# Altium PCB 20K Control Board V1.1.PcbDoc (part 5 of 24)
Units mm, origin at the board's own origin, x right, y up, seen from the top; angles counter-clockwise.
Board outline 132 x 260 mm, 4 copper layers (Top Layer, GND, VCC, Bottom Layer); 1384 components, 779 nets, 4515 pads, 1774 vias.
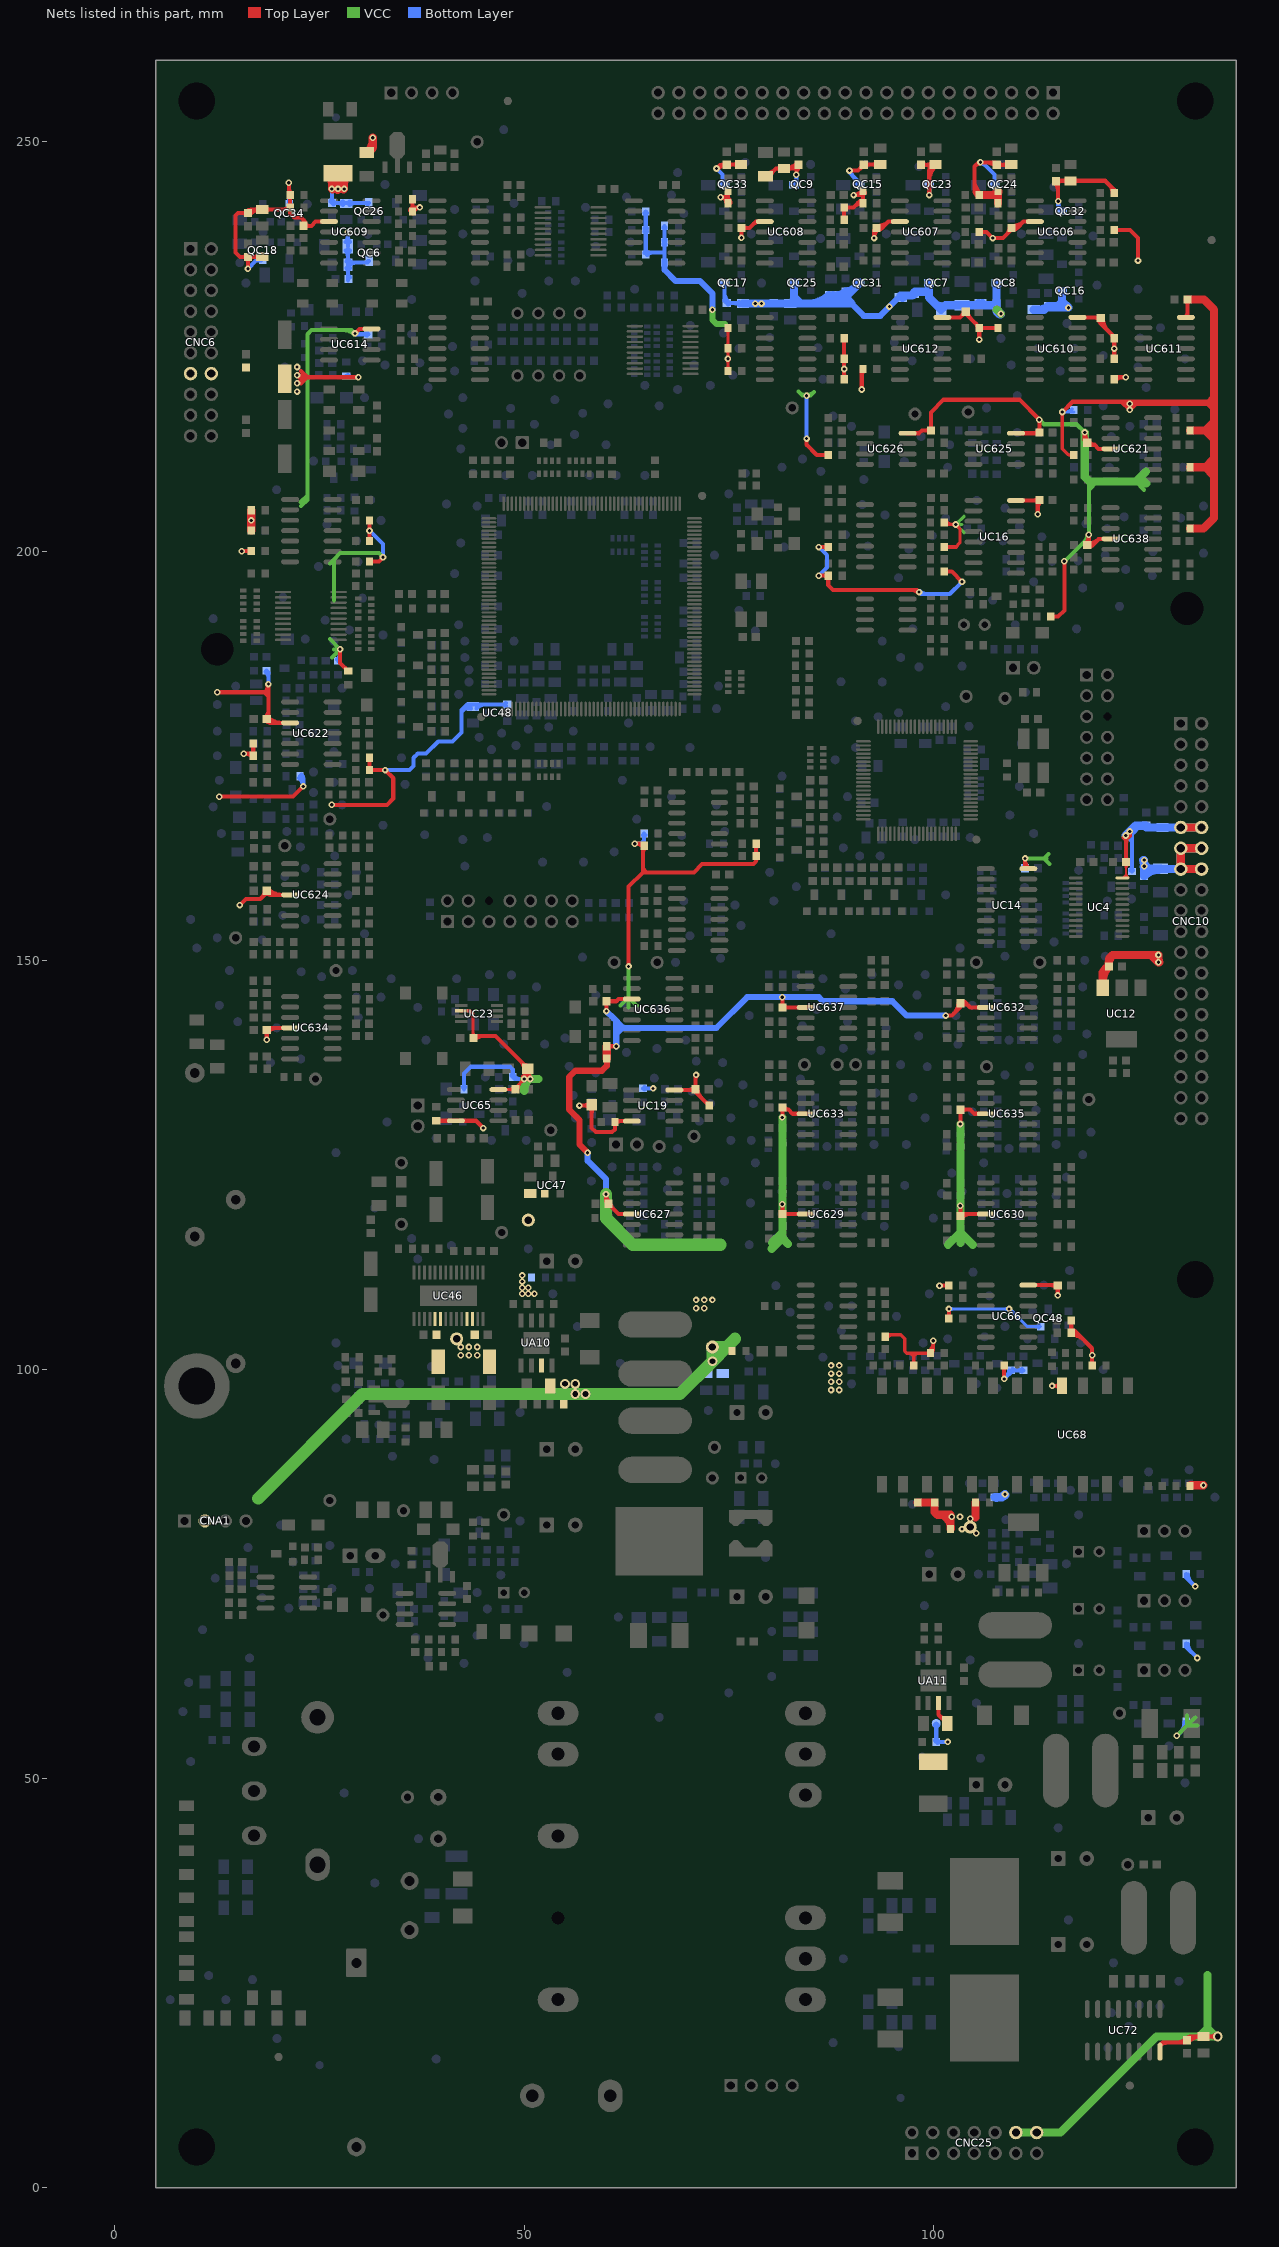
[diagram p7: the nets of this part, all layers, seen from the top]

## Via types
v1: diameter 0.8, hole 0.4, Top Layer to Bottom Layer, tented both sides, 1354 vias
v2: diameter 1.2, hole 0.7, Top Layer to Bottom Layer, 261 vias
v3: diameter 0.8, hole 0.4, Top Layer to Bottom Layer, 58 vias
v4: diameter 1.2, hole 0.7, Top Layer to Bottom Layer, tented top, 58 vias
v5: diameter 0.8, hole 0.4, Top Layer to Bottom Layer, tented top, 22 vias
v6: diameter 1.2, hole 0.7, Top Layer to Bottom Layer, tented both sides, 13 vias
v7: diameter 1.2, hole 0.7, Top Layer to Bottom Layer, tented bottom, 8 vias

## Nets (pads, with @x,y where several pads share a name; then routed paths per layer and width w, separated by ;. In a path a pad name is that pad's centre, name@x,y a point inside that pad or via, vN(x,y) a via of type N, cw(c..) or ccw(c..) an arc to the next point about the centre after c; other vN are vias at no path point) (continued)
+5V: +5V.1 CC84.2 CC95.2 CC103.1 CC163.2 CC183.1 CC184.1 CC193.1 CC196.1 CC222.2 CC292.2 CC295.1 CC302.1 CC318.2 CC326.2 CC327.1 CC393.1 CC401.1 CNC10.11 CNC10.12 EC1.1 EC3.1 LDM1.1 LDM3.1 QC48.2 RA111.1 RC115.2 RC205.1 RC206.2 RC208.1 RC223.1 RC238.2 RC245.2 RC251.2 RC254.2 RC267.2 RC291.2 RC293.2 RC294.2 RC295.2 RC297.2 RC299.2 RC300.2 RC301.2 RC302.2 RC307.2 RC308.2 RC313.2 RC315.2 RC318.2 RC320.2 RC321.2 RC323.2 RC324.2 RC331.2 RC332.2 RC333.2 RC336.2 RC359.2 RC443.2 RC445.2 RC448.2 RC471.2 RC473.2 RC474.2 RC479.2 RC482.1 RC486.1 RC488.2 RC497.2 RC505.1 RC594.2 RC597.2 RC598.2 RC599.1 RC607.1 RC610.2 RC618.1 RC619.1 RC625.1 RC628.2 RC637.2 RC649.2 RC659.1 RC663.2 RC674.2 RC680.1 RC685.2 RC687.2 TP57.1 UC4.24 UC14.16 UC16.16 UC19.4 UC19.8 UC23.2 UC46.5 UC46.6 UC46.11 UC46.12 UC47.1 UC48.1 UC65.4 UC65.8 UC66.14 UC68.4 UC610.14 UC611.14 UC612.14 UC614.8 | length 624.9
  Top Layer w0.25: UC4.24@123.1,160.075 123.55,160.075 123.55,160.5 ; UC4.24@123.125,160.075 123.55,160.5 ; CC222.2@123.285,161.735 cw(c122.645,161.095) 123.55,161.095 cw(c124.455,161.095) CC222.2@123.815,161.735 ; 123.55,160.739 ccw(c124.439,160.739) UC4.24@123.81,160.11 ; CC222.2@123.55,162 123.55,160.5
  Top Layer w0.4: UC23.2@42.323,143.825 43.425,143.825 43.75,143.5 43.75,141.25 ; CC163.2@43.588,140.712 ccw(c43.196,141.104) 43.75,141.104 ; CC163.2@43.75,140.55 43.75,141.25 ; CC163.2@43.993,140.73 cw(c44.428,141.25) 43.75,141.25 ; UC65.8@46.85,134.205 CC393.1@48.905,134.205 ; 48.117,134.205 ccw(c48.117,135.083) CC393.1@48.738,134.462 ; 48.334,134.205 cw(c48.334,133.634) CC393.1@48.738,134.038 ; CC393.1@48.95,134.25 48.95,134.45 v1(50,135.5) 50.425,135.925 ; CC393.1@49.25,134.25 cw(c50.457,134.25) 49.604,135.104 ; v1@49.8,135.5 cw(c49.317,135.5) 49.659,135.159 cw(c50,134.817) v1@50,135.3 ; v1@50,135.7 ccw(c50,136.183) 50.341,135.841 ccw(c50.683,135.5) v1@50.2,135.5 ; v1@50.036,135.536 cw(c50.54,135.031) v1@50.832,135.683 ; LDM3.1@50.147,136.396 cw(c49.699,135.825) 50.425,135.825 ; 50.425,135.798 ccw(c51.042,135.798) v1@50.61,135.357 ; LDM3.1@50.703,136.396 ccw(c51.151,135.825) 50.425,135.825 ; v1@50.89,135.643 cw(c51.975,136.75) LDM3.1@50.425,136.75 50.425,135.925 ; RC323.2@74.723,222.227 ccw(c74.296,222.654) 74.9,222.654 ccw(c75.504,222.654) RC323.2@75.077,222.227 ; RC331.2@74.723,224.563 cw(c74.296,224.136) 74.9,224.136 cw(c75.504,224.136) RC331.2@75.077,224.563 ; RC331.2@74.723,225.017 ccw(c74.296,225.444) 74.9,225.444 ccw(c75.504,225.444) RC331.2@75.077,225.017 ; RC321.2@74.723,227.023 cw(c74.296,226.596) 74.9,226.596 cw(c75.504,226.596) RC321.2@75.077,227.023 ; v1@74.759,223.359 cw(c74.417,223.017) 74.9,223.017 cw(c75.383,223.017) v1@75.041,223.359 ; v1@74.759,223.641 ccw(c74.417,223.983) 74.9,223.983 ccw(c75.383,223.983) v1@75.041,223.641 ; RC323.2@74.9,222 RC331.2@74.9,224.79 RC321.2@74.9,227.25 ; RC663.2@94.1,104 94.35,104.25 96,104.25 96.5,103.75 96.5,102.25 96.75,102 97.2,102 ; RC663.2@94.277,103.873 cw(c95.186,102.964) 95.186,104.25 ; RC637.2@97.423,100.727 ccw(c96.996,101.154) 97.6,101.154 ccw(c98.204,101.154) RC637.2@97.777,100.727 ; RC637.2@97.6,100.5 97.6,101.6 ; RC597.2@99.473,101.823 ccw(c99.046,101.396) 99.046,102 ccw(c99.046,102.604) RC597.2@99.473,102.177 ; RC597.2@99.473,102.227 ccw(c98.201,103.499) v1(100,103.5) ; RC597.2@99.756,101.944 ccw(c99.167,102.533) 100,102.533 ; v1@99.859,103.359 cw(c99.517,103.017) 100,103.017 cw(c100.483,103.017) v1@100.141,103.359 ; v1(100,103.5) 100,102.35 RC597.2@99.65,102 98,102 ; RC223.1@101.527,203.627 ccw(c102.436,204.536) v1@102.436,203.25 ; RC223.1@101.6,203.25 v1(102.75,203.25) 103.25,202.75 103.25,201 102.75,200.5 ; v1@102.609,203.109 ccw(c102.267,202.767) 102.267,203.25 ccw(c102.267,203.733) v1@102.609,203.391 ; v1@102.75,203.05 cw(c102.75,202.567) 103.091,202.909 cw(c103.433,203.25) v1@102.95,203.25 ; v1@115.609,216.859 cw(c115.267,216.517) 115.75,216.517 cw(c116.233,216.517) v1@115.891,216.859 ; v1(115.75,217) 115.75,212.5 116.5,211.75 RC479.2@117.15,211.75 ; RC479.2@116.973,211.573 ccw(c116.546,211.146) 116.546,211.75 ccw(c116.546,212.354) RC479.2@116.973,211.927 ; 50.425,135.825 50.425,135.925 ; 50.425,135.925 ccw(c49.894,135.925) 50.181,136.372 cw(c49.894,135.925) 50.425,135.925 ; 50.425,135.925 cw(c50.956,135.925) 50.669,136.372 ccw(c50.956,135.925) 50.425,135.925 ; 97.2,102 98,102 ; 97.2,102 97.6,101.6 ; 97.6,101.6 98,102
  Top Layer w0.5: v1(15.5,200) RC674.2@16.65,200 ; v1(15.75,175.25) RC443.2@16.9,175.25 ; v1@15.934,175.25 cw(c15.934,174.084) RC443.2@16.759,174.909 ; RC674.2@16.509,199.859 ccw(c16.167,199.517) 16.167,200 ccw(c16.167,200.483) RC674.2@16.509,200.141 ; RC443.2@16.759,175.191 ccw(c16.417,175.533) 16.9,175.533 ccw(c17.383,175.533) RC443.2@17.041,175.191 ; RC445.2@16.759,176.309 cw(c16.417,175.967) 16.9,175.967 cw(c17.383,175.967) RC445.2@17.041,176.309 ; RC443.2@16.9,175 RC445.2@16.9,176.5 ; v1(26.5,169) 33.25,169 34,169.75 34,172.25 v1(33,173.25) RC486.1@31.1,173.25 RC482.1@31.1,174.75 ; v1(27.5,188) 27.5,186.35 RC473.2@28.5,185.35 ; RC473.2@28.073,185.777 cw(c27.646,185.35) RC473.2@28.25,185.35 ; v1(29.327,226.594) 29.888,227.155 UC614.8@31.35,227.155 ; RC486.1@30.959,173.441 ccw(c30.617,173.783) 31.1,173.783 ccw(c31.583,173.783) RC486.1@31.241,173.441 ; RC482.1@30.959,174.559 cw(c30.617,174.217) 31.1,174.217 cw(c31.583,174.217) RC482.1@31.241,174.559 ; RC299.2@30.959,201.441 ccw(c30.617,201.783) 31.1,201.783 ccw(c31.583,201.783) RC299.2@31.241,201.441 ; RC302.2@30.959,203.559 cw(c30.617,203.217) 31.1,203.217 cw(c31.583,203.217) RC302.2@31.241,203.559 ; RC295.2@31.1,198.75 32.25,198.75 v1(32.75,199.25) ; RC299.2@31.1,201.5 v1(31.1,202.5) RC302.2@31.1,203.75 ; RC486.1@31.241,173.109 cw(c31.583,172.767) 31.583,173.25 cw(c31.583,173.733) RC486.1@31.241,173.391 ; RC295.2@31.241,198.609 cw(c31.583,198.267) 31.583,198.75 cw(c31.583,199.233) RC295.2@31.241,198.891 ; RC599.1@39.25,130.4 UC65.4@41.645,130.4 ; RC599.1@39.441,130.259 cw(c39.783,129.917) 39.783,130.4 cw(c39.783,130.883) RC599.1@39.441,130.541 ; UC65.4@41.65,130.395 44.105,130.395 v1(45,129.5) ; CC163.2@43.8,140.5 44.05,140.75 46.5,140.75 48.25,139 LDM3.1@50.425,136.825 ; CC163.2@43.977,140.323 cw(c45.007,139.293) 45.007,140.75 ; 49.604,137.646 cw(c48.708,136.75) LDM3.1@49.975,136.75 ; v1@49.878,135.828 cw(c50.108,135.21) v1@50.574,135.676 ; LDM3.1@49.906,137.344 ccw(c50.375,137.814) LDM3.1@50.375,137.15 ; v1(50,135.5) v1(50.75,135.5) 50.425,135.825 ; LDM3.1@50.151,136.459 cw(c49.556,135.825) 50.425,135.825 ; LDM3.1@50.699,136.459 ccw(c51.294,135.825) 50.425,135.825 ; v1@50.845,135.616 cw(c51.565,136.5) 50.425,136.5 50.425,135.825 ; v1(56.75,132.25) LDM1.1@58.1,132.25 ; 57.224,132.25 ccw(c57.224,133.301) LDM1.1@57.967,132.558 ; 57.345,132.25 cw(c57.345,131.37) 57.967,131.992 cw(c57.284,131.309) 58.25,131.309 cw(c59.216,131.309) LDM1.1@58.533,131.992 ; LDM1.1@58.175,132.325 LDM1.1@58.25,132.325 58.25,129.5 58.75,129 60.75,129 61.1,129.35 RC205.1@61.1,130.25 ; RC205.1@60.959,130.059 cw(c60.617,129.717) 61.1,129.717 cw(c61.583,129.717) RC205.1@61.241,130.059 ; RC205.1@61.1,130.345 UC19.4@63.15,130.345 ; RC205.1@61.241,130.159 cw(c61.691,129.709) 61.691,130.345 ; v1(62.75,149.25) 62.75,159 64.5,160.75 ; v1(63.5,164.25) RC685.2@64.65,164.25 ; v1@63.684,164.25 cw(c63.684,163.084) RC685.2@64.509,163.909 ; 64.5,163.105 cw(c65.495,163.105) RC685.2@64.791,163.809 ; RC685.2@64.5,163.884 64.5,161.2 ; 64.95,160.75 64.5,161.2 ; UC19.8@68.35,134.155 CC103.1@70.855,134.155 ; 70.117,134.155 ccw(c70.117,135.083) 70.773,134.427 ccw(c70.346,134.854) 70.95,134.854 ccw(c71.554,134.854) CC103.1@71.127,134.427 ; 70.95,135.517 cw(c71.483,135.517) v1@71.106,135.894 ; v1@70.95,136 CC103.1@70.95,134.25 70.95,133.9 RC206.2@72.6,132.25 ; CC103.1@71.2,134.25 ccw(c72.649,134.25) 71.624,133.226 ; RC206.2@72.173,132.677 ccw(c72.6,133.104) RC206.2@72.6,132.5 ; RC687.2@78.209,162.559 cw(c77.867,162.217) 78.35,162.217 cw(c78.833,162.217) RC687.2@78.491,162.559 ; RC687.2@78.209,162.941 ccw(c77.867,163.283) 78.35,163.283 ccw(c78.833,163.283) RC687.2@78.491,162.941 ; RC659.1@78.209,164.059 cw(c77.867,163.717) 78.35,163.717 cw(c78.833,163.717) RC659.1@78.491,164.059 ; RC659.1@78.35,164.25 RC687.2@78.35,162.75 78.35,162.1 78,161.75 71.75,161.75 70.75,160.75 64.5,160.75 ; v1(84.5,213.75) 84.5,213 85.75,211.75 RC115.2@87.15,211.75 ; v1(86,197) RC254.2@87.15,197 87.15,195.85 87.75,195.25 98,195.25 v1(98.25,195) ; v1(86,200.5) RC238.2@87.15,200.5 ; RC254.2@87.009,196.809 cw(c86.667,196.467) 87.15,196.467 cw(c87.633,196.467) RC254.2@87.291,196.809 ; RC254.2@87.009,196.859 ccw(c86.667,196.517) 86.667,197 ccw(c86.667,197.483) RC254.2@87.009,197.141 ; RC238.2@87.009,200.359 ccw(c86.667,200.017) 86.667,200.5 ccw(c86.667,200.983) RC238.2@87.009,200.641 ; RC115.2@87.009,211.609 ccw(c86.667,211.267) 86.667,211.75 ccw(c86.667,212.233) RC115.2@87.009,211.891 ; RC336.2@88.959,221.191 ccw(c88.617,221.533) 89.1,221.533 ccw(c89.583,221.533) RC336.2@89.241,221.191 ; RC332.2@88.959,223.309 cw(c88.617,222.967) 89.1,222.967 cw(c89.583,222.967) RC332.2@89.241,223.309 ; RC332.2@88.959,223.691 ccw(c88.617,224.033) 89.1,224.033 ccw(c89.583,224.033) RC332.2@89.241,223.691 ; RC318.2@88.959,225.809 cw(c88.617,225.467) 89.1,225.467 cw(c89.583,225.467) RC318.2@89.241,225.809 ; RC336.2@89.1,221 RC332.2@89.1,223.5 RC318.2@89.1,226 ; v1(91.25,219.75) 91.25,222.1 RC333.2@91.4,222.25 ; 91.25,221.355 cw(c92.245,221.355) RC333.2@91.541,222.059 ; 97.284,195.25 cw(c97.284,194.034) v1@98.144,194.894 ; v1(100.75,110.25) RC618.1@101.9,110.25 ; UC612.14@101.1,228.56 103.26,228.56 CC193.1@103.95,229.25 103.95,229.05 105.6,227.4 RC324.2@105.6,227.25 ; RC245.2@101.35,197.5 102.25,197.5 v1(103.5,196.25) ; RC251.2@101.35,200.5 102.75,200.5 ; RC245.2@101.491,197.359 cw(c101.833,197.017) 101.833,197.5 cw(c101.833,197.983) RC245.2@101.491,197.641 ; RC251.2@101.491,200.359 cw(c101.833,200.017) 101.833,200.5 cw(c101.833,200.983) RC251.2@101.491,200.641 ; RC619.1@101.759,106.441 ccw(c101.417,106.783) 101.9,106.783 ccw(c102.383,106.783) RC619.1@102.041,106.441 ; RC618.1@101.759,110.109 ccw(c101.417,109.767) 101.417,110.25 ccw(c101.417,110.733) RC618.1@101.759,110.391 ; RC619.1@101.9,106.5 v1(101.9,107.4) ; CC193.1@103.7,229.25 cw(c103.096,229.25) 103.523,228.823 cw(c103.95,228.396) CC193.1@103.95,229 ; CC193.1@104.2,229.25 ccw(c105.286,229.25) 104.518,228.482 ; 105.188,227.812 cw(c104.676,227.3) RC324.2@105.4,227.3 ; RC324.2@105.459,227.059 cw(c105.117,226.717) 105.6,226.717 cw(c106.083,226.717) RC324.2@105.741,227.059 ; v1(105.6,225.85) RC324.2@105.6,227.25 ; RC324.2@105.741,227.109 cw(c106.083,226.767) 106.083,227.25 cw(c106.083,227.733) RC324.2@105.741,227.391 ; RC293.2@107.759,227.109 ccw(c107.417,226.767) 107.417,227.25 ccw(c107.417,227.733) RC293.2@107.759,227.391 ; RC293.2@107.9,227.25 RC324.2@105.6,227.25 ; RC649.2@108.509,100.309 cw(c108.167,99.967) 108.65,99.967 cw(c109.133,99.967) RC649.2@108.791,100.309 ; v1(108.65,98.85) RC649.2@108.65,100.5 ; UC16.16@110.1,206.195 112.895,206.195 CC95.2@112.95,206.25 ; UC14.16@111.2,161.3 v1(111.2,162.45) ; v1@111.2,162.281 ccw(c112.686,162.281) UC14.16@111.635,161.23 ; UC66.14@111.6,110.31 115.14,110.31 CC401.1@115.2,110.25 v1(115.2,109.05) ; 112.214,206.195 ccw(c112.214,206.986) CC95.2@112.773,206.427 ; v1(112.75,204.5) CC95.2@112.75,206.25 ; 112.75,205.164 cw(c114.036,205.164) CC95.2@113.127,206.073 ; 114.452,110.31 cw(c114.452,109.502) 115.023,110.073 cw(c114.596,109.646) 115.2,109.646 cw(c115.804,109.646) CC401.1@115.377,110.073 ; v1(114.5,98) UC68.4@115.73,98 ; UC68.4@115.483,97.753 ccw(c114.885,97.155) 114.885,98 ccw(c114.885,98.845) UC68.4@115.483,98.247 ; v1(115.75,217) 117,218.25 134.3,218.25 ; RC505.1@116.704,104.712 cw(c116.981,104.216) 117.382,104.618 ; RC505.1@116.709,104.691 ccw(c116.367,105.033) 116.85,105.033 ccw(c117.333,105.033) RC505.1@116.991,104.691 ; RC625.1@116.709,105.809 cw(c116.367,105.467) 116.85,105.467 cw(c117.333,105.467) RC625.1@116.991,105.809 ; RC505.1@116.85,104.25 cw(c116.85,102.077) 118.386,103.614 ; RC505.1@116.85,104.75 cw(c116.85,103.784) 117.533,104.467 ; RC625.1@116.85,106 RC505.1@116.85,104.5 117.5,104.5 119.4,102.6 RC628.2@119.4,100.5 ; RC505.1@116.948,104.275 cw(c117.316,103.616) 117.85,104.15 ; RC505.1@116.991,104.359 cw(c117.333,104.017) 117.333,104.5 cw(c117.333,104.983) RC505.1@116.991,104.641 ; UC610.14@117.6,228.56 CC184.1@120.39,228.56 ; RC628.2@119.259,100.691 ccw(c118.917,101.033) 119.4,101.033 ccw(c119.883,101.033) RC628.2@119.541,100.691 ; 119.702,228.56 cw(c119.702,227.752) 120.273,228.323 cw(c119.726,227.776) 120.5,227.776 ; CC184.1@120.2,228.5 ccw(c121.286,228.5) 120.518,227.732 ; CC184.1@120.5,228.45 120.5,227.75 122.1,226.15 RC301.2@122.1,226 RC313.2@122.1,223.5 ; CC184.1@120.7,228.5 ccw(c122.994,228.5) 121.372,226.878 ; 121.688,226.562 cw(c121.176,226.05) RC301.2@121.9,226.05 ; RC313.2@121.959,223.691 ccw(c121.617,224.033) 122.1,224.033 ccw(c122.583,224.033) RC313.2@122.241,223.691 ; RC301.2@121.959,225.809 cw(c121.617,225.467) 122.1,225.467 cw(c122.583,225.467) RC301.2@122.241,225.809 ; RC320.2@122.1,221 122.35,221.25 v1(123.5,221.25) ; RC320.2@122.241,220.909 cw(c123.066,220.084) 123.066,221.25 ; 123,218.25 v1(124,217.25) ; 123.034,218.25 cw(c123.034,217.034) v1@123.894,217.894 ; CC222.2@123.373,162.177 ccw(c122.946,162.604) 123.55,162.604 ccw(c124.154,162.604) CC222.2@123.727,162.177 ; v1@123.394,165.144 cw(c123.017,164.767) 123.55,164.767 ; 123.5,164.75 123.25,165 v1(124,165.75) ; CC222.2@123.55,162 123.55,165.3 v1(124,165.75) ; 123.55,164.301 cw(c125.449,164.301) v1@124.106,165.644 ; 123.55,164.75 124,165.2 v1(124,165.75) ; v1@123.55,165.114 cw(c124.037,165.114) v1@124.009,165.6 ; v1@123.824,217.697 ccw(c124.122,218.21) 124.541,217.791 ; v1@123.825,165.025 ccw(c123.475,165.375) v1@123.878,165.663 ; v1(124,218) 133.25,218 ; v1@124,218.25 v1(124,217.25) ; v1@124.075,218.13 ccw(c124.46,218.79) 125,218.25 v1(124,217.25) ; v1@124.106,217.894 cw(c124.966,217.034) 124.966,218.25 ; UC611.14@130.815,228.595 ccw(c130.246,229.164) 131.05,229.164 ; CC183.1@130.873,230.573 cw(c130.446,230.146) 131.05,230.146 cw(c131.654,230.146) CC183.1@131.227,230.573 ; UC611.14@131.05,228.76 CC183.1@131.05,230.75 ; 134.05,218 133.5,218 ; 134.25,217.25 133.5,218 ; 134.3,219.05 133.25,218 ; 64.5,160.75 64.5,161.2 ; 133.25,218 133.5,218
  Top Layer w1: RC680.1@16.65,202.5 v1(16.65,203.75) RC307.2@16.65,205 ; CNC10.11@130.23,166.23 CNC10.12@132.77,166.23 ; CC183.1@131.05,230.75 133.05,230.75 134.3,229.5 134.3,204.05 133,202.75 RC448.2@131.35,202.75 ; RC488.2@131.35,210.25 133.25,210.25 ; RC497.2@131.35,214.75 133.25,214.75 ; 134,210.25 133.25,210.25 ; 134,214.75 133.25,214.75 ; 134.25,209.25 133.25,210.25 ; 134.25,211.25 133.25,210.25 ; 134.25,213.75 133.25,214.75 ; 134.25,215.75 133.25,214.75
  VCC w0.4: v1@102.75,203.05 cw(c102.75,202.567) 103.091,202.909 cw(c103.433,203.25) 102.95,203.25 cw(c103.433,203.25) 103.091,203.591 cw(c102.75,203.933) v1@102.75,203.45 ; v1@102.891,203.109 cw(c103.233,202.767) 103.233,203.25 cw(c103.233,203.733) v1@102.891,203.391 ; 103.5,203.25 v1(102.75,203.25) ; 103.75,202.25 v1(102.75,203.25) ; 103.75,204.25 v1(102.75,203.25)
  VCC w0.5: 22.691,206 23.5,206.809 ; 22.75,205.5 23.5,206.25 23.5,206.809 ; 24.25,227 27,227 ; 26.25,189.25 v1(27.5,188) ; 26.25,198.5 26.75,199 ; 26.5,187 v1(27.5,188) ; 26.75,188 v1(27.5,188) ; 26.75,194 26.75,199 ; 27.985,227 cw(c27.985,225.252) v1@29.221,226.488 ; v1(29.327,226.594) 28.921,227 27,227 ; v1(32.75,199.25) 32.25,199.75 27.5,199.75 26.75,199 ; 61.75,144.5 62.75,145.5 ; 62.75,144.25 62.75,145.5 ; v1(62.75,149.25) 62.75,145.5 ; 63.75,144.5 62.75,145.5 ; 83.5,219.5 84,219 v1(84.5,219) 85,219 85.434,219.434 cw(c84.705,220.164) v1@84.526,219.148 ; 83.75,219.25 ccw(c84.173,219.673) v1@84.434,219.135 ; v1(111.2,162.45) 113.5,162.45 ; 113.847,162.45 113.5,162.45 ; 114.05,163 113.5,162.45 ; 114.2,161.75 113.5,162.45 ; 23.5,206.809 23.5,226.5 24,227 27,227
  VCC w0.75: v1(73,229.5) 73,228.279 73.529,227.75 74.5,227.75
  VCC w1: 50,134.042 cw(c52.059,134.042) v1@50.683,135.574 ; 50,134.25 v1(50,135.5) 51.75,135.5 ; 50,134.75 cw(c50.858,134.75) v1@50.736,135.599
  Bottom Layer w0.4: v1(101.9,107.4) 109.35,107.4 111.5,105.25 QC48.2@113.095,105.25 ; v1@102.041,107.259 cw(c102.383,106.917) 102.383,107.4 cw(c102.383,107.883) v1@102.041,107.541 ; v1@109.109,107.259 ccw(c108.767,106.917) 108.767,107.4 ccw(c108.767,107.883) v1@109.109,107.541 ; v1@109.25,107.2 cw(c109.25,106.476) 109.762,106.988 ; QC48.2@112.913,105.068 ccw(c112.474,104.629) 112.474,105.25 ccw(c112.474,105.871) QC48.2@112.913,105.432 ; v1(115.75,217) RC471.2@117.15,217 ; v1@115.891,216.859 cw(c116.233,216.517) 116.233,217 cw(c116.233,217.483) v1@115.891,217.141 ; v1@116.064,217 ccw(c116.064,218.286) RC471.2@116.973,217.377
  Bottom Layer w0.5: RC474.2@27.159,186.741 ccw(c26.334,187.566) 27.5,187.566 ; RC474.2@27.25,186.6 27.5,186.85 v1(27.5,188) ; v1(29.327,226.594) 29.421,226.5 CC196.1@30.95,226.5 ; v1@29.433,226.7 ccw(c29.916,227.184) 29.916,226.5 ; CC196.1@30.773,226.323 ccw(c30.346,225.896) 30.346,226.5 ccw(c30.346,227.104) CC196.1@30.773,226.677 ; v1(31.1,202.5) 32.75,200.85 v1(32.75,199.25) ; v1(33,173.25) 36,173.25 36.5,173.75 36.5,174.75 37,175.25 38,175.25 39.5,176.75 41.25,176.75 42.35,177.85 42.35,179.5 ; RC607.1@42.509,134.441 ccw(c42.167,134.783) 42.65,134.783 ccw(c43.133,134.783) RC607.1@42.791,134.441 ; 42.643,180.893 cw(c43.411,180.126) CC302.1@43.581,181.198 ; RC607.1@42.65,134.25 42.65,136.15 43.5,137 48.25,137 48.6,136.65 RC610.2@48.6,135.75 ; CC302.1@43.5,180.75 42.75,180.75 42.35,180.35 42.35,179.5 ; CC302.1@44.162,180.788 cw(c45.278,179.672) 45.278,181.25 ; 47.425,181.25 43,181.25 42.35,180.6 42.35,179.5 ; UC48.1@47.748,181.073 ccw(c47.321,180.646) 47.321,181.25 ccw(c47.321,181.854) UC48.1@47.748,181.427 ; RC610.2@48.459,135.941 ccw(c48.117,136.283) 48.6,136.283 ccw(c49.083,136.283) RC610.2@48.741,135.941 ; RC610.2@48.741,135.841 ccw(c49.566,136.666) 49.566,135.5 ; RC610.2@48.85,135.5 v1(50.75,135.5) ; v1(63.5,164.25) 64.25,164.25 64.65,164.65 RC267.2@64.65,165.5 ; RC208.1@64.5,134.35 v1(65.75,134.35) ; RC267.2@64.509,165.309 cw(c64.167,164.967) 64.65,164.967 cw(c65.133,164.967) RC267.2@64.791,165.309 ; RC208.1@64.691,134.209 cw(c65.033,133.867) 65.033,134.35 cw(c65.033,134.833) RC208.1@64.691,134.491 ; RC294.2@64.709,236.441 ccw(c64.367,236.783) 64.85,236.783 ccw(c65.333,236.783) RC294.2@64.991,236.441 ; RC291.2@64.709,239.059 cw(c64.367,238.717) 64.85,238.717 cw(c65.333,238.717) RC291.2@64.991,239.059 ; RC291.2@64.709,239.441 ccw(c64.367,239.783) 64.85,239.783 ccw(c65.333,239.783) RC291.2@64.991,239.441 ; RC297.2@64.709,241.309 cw(c64.367,240.967) 64.85,240.967 cw(c65.333,240.967) RC297.2@64.991,241.309 ; RC297.2@64.85,241.5 64.85,236.5 67.15,236.5 ; RC294.2@64.991,236.159 cw(c65.816,235.334) 65.816,236.5 ; RC315.2@67.009,235.441 ccw(c66.667,235.783) 67.15,235.783 ccw(c67.633,235.783) RC315.2@67.291,235.441 ; RC308.2@67.009,237.559 cw(c66.667,237.217) 67.15,237.217 cw(c67.633,237.217) RC308.2@67.291,237.559 ; RC308.2@67.009,237.941 ccw(c66.667,238.283) 67.15,238.283 ccw(c67.633,238.283) RC308.2@67.291,237.941 ; RC300.2@67.009,239.559 cw(c66.667,239.217) 67.15,239.217 cw(c67.633,239.217) RC300.2@67.291,239.559 ; RC315.2@67.15,235.25 RC300.2@67.15,239.75 ; v1(84.5,213.75) v1(84.5,219) ; v1(86,197) 87,198 87,199.5 v1(86,200.5) ; v1(98.25,195) 98.5,194.75 102,194.75 v1(103.5,196.25) ; v1@98.356,195.106 ccw(c99.216,195.966) 99.216,194.75 ; v1(108.65,98.85) 109.7,99.9 RC598.2@111,99.9 ; v1@108.932,99.132 ccw(c108.164,99.9) RC594.2@109.25,99.9 ; RC594.2@109.691,99.759 cw(c110.033,99.417) 110.033,99.9 cw(c110.033,100.383) RC594.2@109.691,100.041 ; RC598.2@110.809,99.759 ccw(c110.467,99.417) 110.467,99.9 ccw(c110.467,100.383) RC598.2@110.809,100.041 ; CC84.2@111.023,161.427 ccw(c110.596,161.854) 111.2,161.854 ccw(c111.804,161.854) CC84.2@111.377,161.427 ; CC84.2@111.2,161.25 v1(111.2,162.45) ; v1(123.5,165.25) 124.25,164.5 124.25,164.25 ; v1@123.894,165.644 cw(c123.034,164.784) 124.25,164.784 ; v1(124,165.75) 124.25,165.5 124.25,164.25 ; RC359.2@124.109,160.991 ccw(c123.767,161.333) 124.25,161.333 ccw(c124.733,161.333) RC359.2@124.391,160.991 ; RC359.2@124.25,160.85 124.25,164.25
  Bottom Layer w0.75: RC315.2@67.15,235.25 67.15,234.35 68.5,233 71.5,233 73,231.5 v1(73,229.5)
  Bottom Layer w1: v1(123.5,165.25) 124.7,166.45 124.95,166.45 ; v1@124.25,165.75 124.95,166.45 ; CC327.1@126,166.25 CC327.1@126,166.45 ; 126.531,166.23 cw(c126.531,166.981) CC327.1@126,166.45 ; CNC10.12@132.77,166.23 CNC10.11@130.23,166.23 126.22,166.23 CC327.1@126,166.45 ; 124.95,166.45 CC327.1@126,166.45
  other v1: 87.5,97.5 88.5,97.5 87.5,98.5 88.5,98.5 87.5,99.5 88.5,99.5 87.5,100.5 88.5,100.5 119.4,101.75 109.25,107.4 71,107.5 72,107.5 71,108.5 72,108.5 73,108.5 49.75,109.25 50.5,109.25 51.25,109.25 49.75,110 50.5,110 49.75,110.75 49.75,111.5 71,136 89.1,222.25 74.9,223.5 122.1,224.75
  other v3: 42.25,102.75 43.25,102.75 44.25,102.75
  other v5: 42.25,101.75 43.25,101.75 44.25,101.75
+5V_COM: +5V_COM.1 CC251.2 CC411.2 CNC25.12 CNC25.14 RA126.1 RC81.1 RC82.1 RC85.1 RC608.2 RC611.2 RC620.2 RC638.2 RC650.2 UC72.16 | length 91.8
  Top Layer w0.5: UC72.16@127.695,16.65 127.695,17.445 128,17.75 130.7,17.75 131.45,18.5 CC251.2@133,18.5 v6(134.75,18.5) ; UC72.16@127.73,17.415 cw(c128.54,16.605) 128.54,17.75 ; 129.672,17.75 ccw(c129.672,19.378) 130.823,18.227 cw(c131.483,17.567) CC411.2@131.483,18.5 ; CC411.2@131.177,17.873 cw(c132.69,16.36) CC251.2@132.69,18.5 ; CC251.2@132.588,18.288 ccw(c132.076,17.776) 132.076,18.5 ccw(c132.076,19.224) CC251.2@132.588,18.712 ; CC251.2@133.412,18.288 cw(c133.924,17.776) 133.924,18.5 cw(c133.924,19.224) CC251.2@133.412,18.712 ; v6@134.503,18.253 ccw(c133.905,17.655) 133.905,18.5 ccw(c133.905,19.345) v6@134.503,18.747
  Top Layer w1: RC650.2@98.1,83.75 RC611.2@100.15,83.75 100.15,82.6 100.5,82.25 101.25,82.25 ; 101.584,81.915 cw(c100.219,80.55) RA126.1@102.15,80.55 ; RA126.1@102.1,80.5 102.1,82.25 101.25,82.25 ; 102.1,81.25 102.1,81.4 101.25,82.25 ; 105.15,81.9 RC608.2@105.15,83.75 ; RC620.2@131.45,85.85 v3(133,85.85)
  VCC w0.5: v1(129.75,55.25) 131,56.5 ; 131,57.75 131,56.5 ; 132,57.5 131,56.5 ; 132.25,56.5 131,56.5
  VCC w1: CNC25.14@112.02,6.77 CNC25.12@110.08,6.77 CNC25.14@112.62,6.77 115.52,6.77 127.25,18.5 133.5,18.5 ; 132.5,18.5 133.5,19.5 ; 133.5,26 133.5,19.5 ; 134.152,18.848 ccw(c134.75,19.445) v6@134.75,18.6 ; v6@134.5,18.5 133.5,19.5 ; v6(134.75,18.5) 133.5,18.5 ; 133.5,18.5 133.5,19.5
  Bottom Layer w0.5: v1(129.75,55.25) 130.75,56.25 RC81.1@130.75,56.85 ; 130.17,55.67 ccw(c128.889,56.95) RC81.1@130.7,56.95 ; 130.75,56.234 cw(c131.457,56.234) RC81.1@131.023,56.792 ; RC82.1@130.9,66.5 130.9,66.1 v1(132.25,64.75) ; RC85.1@130.9,75 130.9,74.6 v1(132,73.5) ; RC82.1@131.1,66.45 ccw(c132.428,66.45) 131.489,65.511 ; RC85.1@131.1,74.95 ccw(c132.428,74.95) 131.489,74.011
  Bottom Layer w1: RC638.2@107.5,84.4 108.4,84.4 v1(108.75,84.75) cw(c107.749,85.751) RC638.2@107.543,84.351 ; 108.146,84.4 ccw(c108.146,85.354) v1@108.821,84.679
  other v1: 102.25,82 103.25,82
  other v3: 105.25,80 103.5,80.5 104.5,81.75
+7V_COM: CA94.2 FA3.1 pad.ICT@100.35,56.75 RA133.1 UA11.7 | length 10.2
  Top Layer w0.5: UA11.7@100.635,59.25 100.635,57.815 CA94.2@101.7,56.75 ; 100.76,57.69 ccw(c101.495,58.425) CA94.2@101.643,57.396
  Bottom Layer w0.5: pad.ICT@100.138,56.538 cw(c99.626,56.026) 100.35,56.026 cw(c101.074,56.026) pad.ICT@100.562,56.538 ; RA133.1@100.209,54.691 ccw(c99.867,55.033) 100.35,55.033 ccw(c100.833,55.033) RA133.1@100.491,54.691 ; pad.ICT@100.35,56.75 RA133.1@100.35,54.5 v3(101.75,54.5) ; RA133.1@100.491,54.359 cw(c100.833,54.017) 100.833,54.5 cw(c100.833,54.983) RA133.1@100.491,54.641
+12V: +12V-A.1 CA74.2 CC9.1 CC16.1 CC18.1 CC19.2 CC21.1 CC55.2 CC63.1 CC77.1 CC78.2 CC82.1 CC87.1 CC178.1 CC201.1 CC203.1 CC204.1 CC205.1 CC206.1 CC207.1 CC208.1 CC209.1 CC214.2 CC216.2 CC218.2 CC220.2 CC223.1 CC224.1 CC225.1 CC226.1 CC233.1 CC234.1 CC235.1 CC236.1 CC244.1 CC245.1 CC246.1 CC247.1 CC255.1 CC275.1 CC277.1 CC278.1 CC317.1 CC320.2 CC321.1 CC328.1 CC329.1 CC330.1 CC331.1 CC332.1 CC333.1 CC334.1 CC335.1 CC336.1 CC337.1 CC338.1 CC339.1 CC340.1 CC341.1 CC342.1 CC343.1 CNA1.2 CNC6.13 CNC6.14 CNC10.13 CNC10.14 CNC10.15 CNC10.16 EC8.1 FA1.2 LA3.2 LA16.2 QC6.3 QC7.3 QC8.3 QC9.3 QC15.3 QC16.3 QC17.3 QC18.3 QC23.3 QC24.3 QC25.3 QC26.3 QC31.3 QC32.3 QC33.3 QC34.3 RA113.1 RA192.2 RC129.2 RC322.2 RC344.2 RC349.2 RC350.2 RC352.2 RC353.2 RC361.2 RC362.2 RC363.2 RC364.2 RC371.2 RC372.2 RC373.2 RC374.2 RC383.2 RC384.2 RC385.2 RC386.2 RC451.2 RC452.2 RC459.1 RC511.2 UA10.7 UC12.3 UC606.3 UC607.3 UC608.3 UC609.3 UC621.4 UC622.3 UC624.4 UC625.8 UC626.8 UC627.4 UC629.4 UC630.4 UC632.4 UC633.4 UC634.4 UC635.4 UC636.3 UC637.4 UC638.4 | length 816.8
  Top Layer w0.5: v1(12.5,182.75) 18.25,182.75 ; v1(12.75,170) 21.75,170 v1(23,171.25) ; v1(15.25,156.75) 16,157.5 17.75,157.5 18.55,158.3 CC19.2@18.55,158.5 19.05,158 UC624.4@21,158 ; CC225.1@16.073,236.127 cw(c15.646,236.554) 15.646,235.95 cw(c15.646,235.346) 16.073,235.773 cw(c15.646,235.346) 16.25,235.346 cw(c16.854,235.346) 16.427,235.773 cw(c16.854,235.346) 16.854,235.95 cw(c16.854,236.554) CC225.1@16.427,236.127 ; CC247.1@16.073,241.123 ccw(c15.646,240.696) 15.646,241.3 ccw(c15.646,241.904) 16.073,241.477 cw(c16.733,240.817) CC247.1@16.733,241.75 ; v1(16.25,234.5) CC225.1@16.25,235.95 ; CC247.1@16.427,241.123 cw(c17.94,239.61) CC342.1@17.94,241.75 ; 16.955,235.95 ccw(c16.955,236.845) CC334.1@17.588,236.212 ; 17.196,235.95 cw(c17.196,235.396) CC334.1@17.588,235.788 ; CC342.1@17.588,241.538 ccw(c17.076,241.026) 17.076,241.75 ccw(c17.076,242.474) CC342.1@17.588,241.962 ; CC334.1@17.95,235.95 CC225.1@16.25,235.95 ; 17.982,157.732 ccw(c17.214,158.5) CC19.2@18.3,158.5 ; CC18.1@18.373,141.323 cw(c17.946,140.896) 18.55,140.896 cw(c19.154,140.896) 18.727,141.323 cw(c19.757,140.293) 19.757,141.75 ; CC19.2@18.373,158.323 ccw(c19.154,159.104) 19.154,158 ; CC278.1@18.373,179.323 ccw(c19.105,180.055) 19.105,179.02 ; CC278.1@18.373,179.677 ccw(c17.464,180.586) 18.75,180.586 ; CC342.1@18.412,241.538 cw(c18.924,241.026) 18.924,241.75 cw(c18.924,242.474) CC342.1@18.412,241.962 ; 18.5,183 ccw(c18.077,183.423) v1@18.615,183.684 ; v1(18.55,140.3) CC18.1@18.55,141.5 ; CC19.2@18.727,158.677 ccw(c20.361,160.311) UC624.4@20.361,158 ; CC278.1@18.727,179.677 ccw(c20.312,181.262) UC622.3@20.312,179.02 ; 18.75,182.25 18.25,182.75 ; 18.75,182.75 18.25,182.75 ; 18.75,183.25 18.25,182.75 ; v1(18.75,183.75) 18.75,179.7 CC278.1@18.55,179.5 19.03,179.02 UC622.3@21.4,179.02 ; CC18.1@18.8,141.75 UC634.4@21.4,141.75 ; 20.25,158 UC624.4@21,158 ; 20.434,241.75 ccw(c20.434,242.916) RC363.2@21.259,242.091 ; RC386.2@21.25,243.65 v1(21.25,245) ; 21.25,244.395 ccw(c22.245,244.395) RC386.2@21.541,243.691 ; RC363.2@21.259,241.809 cw(c20.917,241.467) 21.4,241.467 cw(c21.883,241.467) RC363.2@21.541,241.809 ; RC363.2@21.259,242.191 ccw(c20.917,242.533) 21.4,242.533 ccw(c21.883,242.533) RC363.2@21.541,242.191 ; RC386.2@21.259,243.309 cw(c20.917,242.967) 21.4,242.967 cw(c21.883,242.967) RC386.2@21.541,243.309 ; UC624.4@21.4,158 UC624.4@21,158 ; RC386.2@21.4,243.5 RC363.2@21.4,242 ; v1@22.25,220.65 ccw(c22.25,222.219) 23.36,221.11 ; v1(22.25,221.5) 22.5,221.25 23.5,221.25 ; v1@22.356,221.606 ccw(c23.216,222.466) 23.216,221.25 ; 22.75,220.5 23.5,221.25 ; 22.75,222 23.5,221.25 ; CC317.1@22.873,239.927 ccw(c22.446,240.354) 23.05,240.354 ccw(c23.654,240.354) 23.227,239.927 ccw(c23.654,240.354) 23.654,239.75 ccw(c23.654,239.146) CC317.1@23.227,239.573 ; 23.071,240.429 cw(c22.496,239.853) CC317.1@23.296,239.704 ; UC609.3@26.15,240.27 24.52,240.27 24,239.75 CC317.1@23.05,239.75 23.05,240.45 22.75,240.75 21.9,240.75 21.4,241.25 RC363.2@21.4,242 ; v1(29.75,221.25) 23.5,221.25 ; RC349.2@36.065,241.644 cw(c36.557,241.481) RC349.2@36.557,242 ; RC349.2@36.209,241.691 ccw(c35.867,242.033) 36.35,242.033 ccw(c36.833,242.033) RC349.2@36.491,241.691 ; RC374.2@36.209,242.809 cw(c35.867,242.467) 36.35,242.467 cw(c36.833,242.467) RC374.2@36.491,242.809 ; RC349.2@36.35,241.25 RC349.2@36.35,242 ; RC374.2@36.35,242.75 RC349.2@36.35,242 ; RC349.2@36.54,241.487 cw(c37.249,241.252) v1(37.25,242) RC349.2@36.35,242 ; CC216.2@59.873,144.823 cw(c59.446,144.396) 60.05,144.396 cw(c60.654,144.396) 60.227,144.823 cw(c60.654,144.396) 60.654,145 cw(c60.654,145.604) CC216.2@60.227,145.177 ; v1(60.05,143.8) CC216.2@60.05,145 61.25,145 61.52,145.27 UC636.3@63.15,145.27 ; RC511.2@60.1,139.5 v1(61.25,139.5) ; RC511.2@60.241,139.359 cw(c60.583,139.017) 60.583,139.5 cw(c60.583,139.983) RC511.2@60.241,139.641 ; CC9.1@60.3,120 cw(c60.3,119.396) 60.727,119.823 cw(c61.154,120.25) CC9.1@60.55,120.25 ; CC9.1@60.457,120.445 cw(c61.227,121.4) v1(60,121.4) 60,120.55 CC9.1@60.3,120.25 61.55,119 UC627.4@63.15,119 ; v1(73.5,246.75) 73.95,247.2 CC246.1@74.75,247.2 ; v1@73.617,246.656 cw(c74.75,245.748) CC246.1@74.75,247.2 ; CC246.1@74.45,247.2 CC246.1@74.75,247.2 ; 74.5,243.25 cw(c74.5,242.55) RC364.2@75.2,242.55 ; CC246.1@74.573,247.023 ccw(c74.146,246.596) 74.146,247.2 ccw(c74.146,247.804) CC246.1@74.573,247.377 ; RC364.2@74.7,242.55 ccw(c74,242.55) v1(74,243.25) 74.9,243.25 ; RC385.2@74.759,243.809 cw(c74.417,243.467) 74.9,243.467 cw(c75.383,243.467) RC385.2@75.041,243.809 ; CC246.1@74.8,247.25 CC343.1@76.5,247.25 ; RC364.2@74.9,242.5 74.9,243.25 ; RC385.2@74.9,244 74.9,243.25 ; CC246.1@74.927,247.023 cw(c75.474,246.476) 75.474,247.25 ; CC343.1@76.088,247.038 ccw(c75.576,246.526) 75.576,247.25 ccw(c75.576,247.974) CC343.1@76.088,247.462 ; CC220.2@76.373,239.323 cw(c75.946,238.896) 76.55,238.896 cw(c77.154,238.896) 76.727,239.323 cw(c77.154,238.896) 77.154,239.5 cw(c77.154,240.104) CC220.2@76.727,239.677 ; v1(76.55,238.3) CC220.2@76.55,239.5 77.55,239.5 78.32,240.27 UC608.3@79.4,240.27 ; 78.037,239.987 cw(c78.6,239.423) UC608.3@78.6,240.22 ; CC208.1@79.25,245.8 CC208.1@79.5,245.8 79.8,245.8 80.75,246.75 83,246.75 83.25,247 v1(83.25,246) ; CC208.1@79.75,246.2 ccw(c79.75,247.286) 80.518,246.518 ; CC208.1@80.15,245.8 cw(c80.995,245.8) CC208.1@80.397,246.397 ; CC331.1@81.338,246.538 ccw(c80.826,246.026) 80.826,246.75 ccw(c80.826,247.474) CC331.1@81.338,246.962 ; CC87.1@81.373,119.177 ccw(c80.946,119.604) 81.55,119.604 ccw(c82.154,119.604) 81.727,119.177 ccw(c82.154,119.604) 82.154,119 ccw(c82.154,118.396) CC87.1@81.727,118.823 ; CC78.2@81.373,131.823 cw(c80.946,131.396) 81.55,131.396 cw(c82.154,131.396) CC78.2@81.727,131.823 ; CC178.1@81.373,144.427 ccw(c80.946,144.854) 81.55,144.854 ccw(c82.154,144.854) 81.727,144.427 ccw(c82.154,144.854) 82.154,144.25 ccw(c82.154,143.646) CC178.1@81.727,144.073 ; v1(81.55,120.2) CC87.1@81.55,119 UC629.4@84.4,119 ; v1(81.55,130.8) CC78.2@81.55,132 ; CC78.2@81.55,131.75 82.312,131.75 ; v1(81.55,145.5) 81.55,144.5 81.8,144.25 UC637.4@84.4,144.25 ; CC78.2@81.779,132.099 ccw(c82.312,132.33) 82.312,131.75 ; CC331.1@81.81,246.75 ccw(c81.81,248.89) CC206.1@83.323,247.377 ; CC331.1@82.162,246.538 cw(c82.674,246.026) 82.674,246.75 cw(c82.674,247.474) CC331.1@82.162,246.962 ; CC206.1@83.017,246.75 ccw(c83.017,247.683) 83.677,247.023 ccw(c84.707,245.993) v1@83.25,245.993 ; CC206.1@83.25,247.2 CC206.1@83.25,247.25 ; UC633.4@84.4,131.25 82.812,131.25 82.312,131.75 ; RC373.2@88.959,240.691 ccw(c88.617,241.033) 89.1,241.033 ccw(c89.583,241.033) RC373.2@89.241,240.691 ; RC353.2@88.959,241.809 cw(c88.617,241.467) 89.1,241.467 cw(c89.583,241.467) RC353.2@89.241,241.809 ; RC373.2@89.1,240.5 RC353.2@89.1,242 90.25,242 90.75,242.5 RC383.2@91.4,242.5 RC361.2@91.4,244 ; RC353.2@89.241,241.859 cw(c89.583,241.517) 89.583,242 cw(c89.583,242.483) RC353.2@89.241,242.141 ; v1@90,246.5 90.8,246.5 CC223.1@91.5,247.2 91.55,247.25 CC332.1@93.5,247.25 ; 90.425,242.175 cw(c90.97,241.63) RC383.2@91.311,242.321 ; 90.727,242.477 cw(c91.386,241.819) RC383.2@91.407,242.75 ; 90.918,242.668 cw(c91.296,242.29) RC383.2@91.533,242.769 ; RC361.2@91.135,243.5 ccw(c91.135,244.11) RC361.2@91.657,243.795 ; RC361.2@91.229,244.053 cw(c90.25,244.642) v1(90.25,243.5) RC361.2@91.25,243.5 ; CC223.1@91.25,247.2 cw(c90.646,247.2) 91.073,246.773 cw(c91.5,246.346) CC223.1@91.5,246.95 ; RC383.2@91.259,242.359 ccw(c90.917,242.017) 90.917,242.5 ccw(c90.917,242.983) RC383.2@91.259,242.641 ; RC383.2@91.259,242.691 ccw(c90.917,243.033) 91.4,243.033 ccw(c91.883,243.033) RC383.2@91.541,242.691 ; RC361.2@91.259,243.809 cw(c90.917,243.467) 91.4,243.467 cw(c91.883,243.467) RC361.2@91.541,243.809 ; CC223.1@91.677,247.023 cw(c92.224,246.476) 92.224,247.25 ; v1@92.75,238.215 cw(c94.277,238.215) CC214.2@93.223,239.319 ; v1(92.75,238.25) 92.75,239.2 CC214.2@93.05,239.5 93.75,239.5 94.52,240.27 UC607.3@95.9,240.27 ; CC214.2@93.027,239.251 ccw(c93.113,240.173) 93.768,239.518 ; CC214.2@93.073,239.749 ccw(c93.243,241.547) 94.52,240.27 ; CC332.1@93.088,247.038 ccw(c92.576,246.526) 92.576,247.25 ccw(c92.576,247.974) CC332.1@93.088,247.462 ; CC214.2@93.227,239.323 cw(c93.654,238.896) 93.654,239.5 cw(c93.654,240.104) CC214.2@93.227,239.677 ; UC626.8@96.85,214.405 98.25,214.405 98.595,214.75 CC55.2@99.7,214.75 99.7,216.95 101.25,218.5 110.5,218.5 v1(112.95,216.05) CC77.1@112.95,214.5 ; CC233.1@98.5,247.2 CC336.1@100.2,247.2 ; CC233.1@98.677,247.023 cw(c99.104,246.596) 99.104,247.2 cw(c99.104,247.804) CC233.1@98.677,247.377 ; 99.205,247.2 ccw(c99.205,248.095) CC336.1@99.838,247.462 ; 99.446,247.2 cw(c99.446,246.646) CC336.1@99.838,247.038 ; v1(99.5,243.5) 99.5,246.5 CC336.1@100.2,247.2 ; 99.5,245.198 cw(c102.102,245.198) CC336.1@100.262,247.038 ; 99.5,246.32 cw(c100.134,246.32) CC336.1@100.077,246.951 ; 99.5,246.405 cw(c100.895,246.405) CC336.1@99.909,247.391 ; CC55.2@99.523,214.573 ccw(c99.096,214.146) 99.096,214.75 ccw(c99.096,215.354) 99.523,214.927 ccw(c99.096,215.354) 99.7,215.354 ccw(c100.304,215.354) CC55.2@99.877,214.927 ; 99.6,246.6 ccw(c99.172,247.028) CC336.1@99.759,247.177 ; CC336.1@100.25,247.25 CC336.1@100.2,247.2 ; v1(101.5,143.25) 102.25,143.25 103.25,144.25 CC21.1@103.25,144.7 ; 102.555,143.555 ccw(c101.36,144.75) CC21.1@103.05,144.75 ; CC63.1@103.123,118.927 ccw(c102.696,119.354) 103.3,119.354 ccw(c103.904,119.354) CC63.1@103.477,118.927 ; CC16.1@103.123,131.573 cw(c102.696,131.146) 103.3,131.146 cw(c103.904,131.146) 103.477,131.573 cw(c103.904,131.146) 103.904,131.75 cw(c103.904,132.354) CC16.1@103.477,131.927 ; CC21.1@103.179,144.969 cw(c103.464,144.454) 103.88,144.87 ; CC21.1@103.29,145 cw(c103.332,143.993) 104.045,144.705 ; v1(103.3,120) CC63.1@103.3,118.75 103.55,119 UC630.4@106.4,119 ; v1(103.3,130) CC16.1@103.3,131.75 104.5,131.75 105,131.25 UC635.4@106.4,131.25 ; CC21.1@103.3,144.75 104,144.75 104.5,144.25 UC632.4@106.4,144.25 ; CC21.1@103.421,144.531 cw(c103.798,143.848) 104.35,144.4 ; CC63.1@103.477,118.573 cw(c104.507,117.543) 104.507,119 ; CC21.1@103.477,144.573 cw(c103.904,144.146) 103.904,144.75 cw(c103.904,145.354) CC21.1@103.477,144.927 ; 105,244.274 ccw(c106.324,244.274) RC371.2@105.388,243.338 ; 105,245.481 ccw(c107.531,245.481) RC371.2@105.741,243.691 ; 105.067,247.067 cw(c105.75,246.384) v1@105.75,247.35 ; RC371.2@105.173,243.927 ccw(c105.6,244.354) RC371.2@105.6,243.75 ; RC350.2@105.6,239 106.5,239 v1(107.25,238.25) 108.486,238.25 109.55,239.314 CC218.2@109.55,239.5 110.25,239.5 111.02,240.27 UC606.3@112.4,240.27 ; RC371.2@105.6,243.5 105,244.1 105,247 105.5,247.5 107.45,247.5 CC234.1@107.75,247.2 CC337.1@109.45,247.2 ; RC350.2@105.741,238.859 cw(c106.083,238.517) 106.083,239 cw(c106.083,239.483) RC350.2@105.741,239.141 ; 106.422,247.5 cw(c106.422,245.872) CC234.1@107.573,247.023 ; CC234.1@107.927,247.023 cw(c108.354,246.596) 108.354,247.2 cw(c108.354,247.804) CC234.1@107.927,247.377 ; 108.455,247.2 ccw(c108.455,248.095) CC337.1@109.088,247.462 ; 108.696,247.2 cw(c108.696,246.646) CC337.1@109.088,247.038 ; 108.991,238.755 ccw(c108.246,239.5) CC218.2@109.3,239.5 ; CC218.2@109.527,239.251 ccw(c109.613,240.173) 110.268,239.518 ; CC218.2@109.573,239.749 ccw(c109.743,241.547) 111.02,240.27 ; CC218.2@109.727,239.323 cw(c110.154,238.896) 110.154,239.5 cw(c110.154,240.104) CC218.2@109.727,239.677 ; UC625.8@110.1,214.405 CC77.1@112.855,214.405 ; 112.117,214.405 ccw(c112.117,215.333) 112.773,214.677 ccw(c112.346,215.104) 112.95,215.104 ccw(c113.554,215.104) CC77.1@113.127,214.677 ; RC459.1@114.35,192 115.25,192 116,192.75 v1(116,198.75) ; RC459.1@114.491,191.859 cw(c114.833,191.517) 114.833,192 cw(c114.833,192.483) RC459.1@114.491,192.141 ; CC224.1@114.823,245.023 cw(c113.793,243.993) 115.25,243.993 ; CC224.1@115.177,245.023 cw(c115.724,244.476) 115.724,245.25 ; v1(115.25,242.75) CC224.1@115.25,245.25 ; CC224.1@115.3,245.25 CC333.1@116.75,245.25 121,245.25 122.1,244.15 RC384.2@122.1,243.75 ; CC333.1@116.338,245.038 ccw(c115.826,244.526) 115.826,245.25 ccw(c115.826,245.974) CC333.1@116.338,245.462 ; CC333.1@117.162,245.038 cw(c117.674,244.526) 117.674,245.25 cw(c117.674,245.974) CC333.1@117.162,245.462 ; CC277.1@118.623,200.927 ccw(c117.714,201.836) v1@119,201.836 ; CC277.1@118.773,200.501 ccw(c118.871,201.403) 119.512,200.762 ; CC277.1@118.8,200.75 119.5,200.75 120.25,201.5 ; CC275.1@118.8,213.25 118.5,213.55 v1(118.5,214.5) ccw(c119.945,214.5) CC275.1@118.969,213.434 ; CC277.1@118.827,200.999 ccw(c119.015,202.735) 120.25,201.5 ; CC277.1@118.977,200.573 cw(c119.404,200.146) 119.404,200.75 cw(c119.404,201.354) CC277.1@118.977,200.927 ; CC277.1@119,200.75 v1(119,202) ; CC275.1@119.017,213.374 ccw(c119.663,213.745) 119.663,213 ; CC275.1@119.05,213 119.663,213 ; 121.511,244.739 cw(c120.572,243.8) RC384.2@121.9,243.8 ; UC638.4@121.65,201.5 120.25,201.5 ; UC621.4@121.65,212.5 120.163,212.5 119.663,213 ; RC362.2@122.1,239.25 124,239.25 125,238.25 v1(125,235.5) ; RC362.2@122.241,239.109 cw(c122.583,238.767) 122.583,239.25 cw(c122.583,239.733) RC362.2@122.241,239.391 ; CC225.1@16.25,235.95 15.3,235.95 14.75,236.5 14.75,241 15.05,241.3 CC247.1@16.25,241.3 16.7,241.75 CC342.1@18,241.75 21.15,241.75 RC363.2@21.4,242 ; RC364.2@74.759,242.691 ccw(c74.417,243.033) 74.9,243.033 ; RC364.2@74.759,242.691 ccw(c74.417,243.033) 74.9,243.033 ; RC364.2@74.759,242.691 ccw(c74.417,243.033) 74.9,243.033 ; 74.9,243.033 ccw(c75.383,243.033) RC364.2@75.041,242.691 ; 74.9,243.033 ccw(c75.383,243.033) RC364.2@75.041,242.691 ; 74.9,243.033 ccw(c75.383,243.033) RC364.2@75.041,242.691
  Top Layer w0.75: v1(57.75,126.5) 56.75,127.5 56.75,130.5 55.5,131.75 55.5,135.75 56.25,136.5 59.5,136.5 60.1,137.1 RC129.2@60.1,138
  Top Layer w1: FA1.2@26.146,245.833 cw(c25.293,244.979) 26.5,244.979 cw(c27.707,244.979) FA1.2@26.854,245.833 ; v1@26.571,244.179 ccw(c24.931,245.819) 27.25,245.819 ccw(c29.569,245.819) v1@27.929,244.179 ; FA1.2@26.896,245.833 cw(c26.043,244.979) 27.25,244.979 cw(c28.457,244.979) FA1.2@27.604,245.833 ; v1@27.196,244.166 cw(c28.008,245.436) 26.5,245.436 v1(26.5,244.25) v1(28,244.25) ; FA1.2@27.25,246.187 v1(27.25,244.25) v1(28,244.25) ; v1@27.321,244.179 ccw(c25.681,245.819) FA1.2@28,245.819 ; FA1.2@27.646,245.833 cw(c26.793,244.979) 28,244.979 cw(c29.207,244.979) FA1.2@28.354,245.833 ; FA1.2@28,246 v1(28,244.25) ; RC322.2@30.75,248.7 31.5,249.45 ; RC322.2@30.894,248.806 ccw(c29.431,250.269) v1@31.5,250.269 ; RC322.2@30.979,248.848 ccw(c30.892,249.45) 31.5,249.45 ; RC322.2@31.15,248.7 cw(c32.116,248.7) 31.433,249.383 ; v1(31.5,250.5) 31.5,249.45 ; RC129.2@60.1,138 RC511.2@60.1,139.5 ; RC371.2@105.6,243.5 107.4,243.5 ccw(c107.4,244.062) RC372.2@107.949,243.939 ; 106.934,243.5 ccw(c106.934,244.916) RC372.2@107.935,243.915 ; RC352.2@107.9,242.5 RC372.2@107.9,244 ; UC12.3@120.7,146.65 120.7,148.5 CC82.1@121.45,149.25 ; UC12.3@120.7,147.439 cw(c123.261,147.439) CC82.1@121.45,149.25 ; 120.7,148.189 cw(c121.825,148.189) CC82.1@121.45,149.25 ; v1@127.599,149.762 ccw(c126.6,149.644) 126.6,150.65 ; CNC10.16@132.77,161.15 CNC10.15@130.23,161.15 CNC10.13@130.23,163.69 CNC10.14@132.77,163.69 ; CC82.1@121.45,149.25 cw(c123.038,149.512) 121.9,150.65 ; CC82.1@121.45,149.25 121.45,150.2 121.9,150.65 ; 121.9,150.65 126.6,150.65 ; 126.6,150.65 v1(127.5,149.75) v1(127.5,150.65) 126.6,150.65
  VCC w0.5: v1(112.95,216.05) 113.5,215.5 117.5,215.5 v1(118.5,214.5) ; v1(116,198.75) v1@119,201.75 ; 118.567,201.317 ccw(c117.884,202) v1@118.85,202 ; v1(119,202) 119,207.5 ; 119,208.45 119,207.5 ; 120,208.5 119,207.5 ; 124.75,208.5 125.75,207.5
  VCC w1: 80.25,114.75 81.55,116.05 ; 80.3,115.5 81.55,116.75 ; v1(81.55,130.8) v1(81.55,120.2) 81.55,116.75 ; 82.25,115.35 81.55,116.05 ; 101.8,115.25 103.3,116.75 ; 103.3,115.45 103.3,116.75 ; v1(103.3,130) 103.3,116.75 ; 104.8,115.25 103.3,116.75 ; 107.75,229.5 v1(108.25,229) ; v1(118.5,214.5) 118.5,209.05 119.05,208.5 124.75,208.5 ; 125.988,209.738 124.75,208.5 ; 126,208.25 125.75,208.5 124.75,208.5 ; 81.55,116.05 81.55,116.75
  VCC w1.5: 17.5,84.25 30.25,97 v2(56.25,97) v2(57.5,97) 69,97 v2(73,101) ; v1(60,121.4) 60,118.5 63.25,115.25 74,115.25 ; 75.75,103.75 74.75,102.75 ; v2(73,101) +12V-A.1@73,102.75 74.75,102.75 ; v2(73,101) 74.75,102.75
  Bottom Layer w0.5: v1(16.25,234.5) 17.25,235.5 17.842,235.5 QC18.3@18.06,235.718 ; 17.463,235.5 ccw(c17.463,236.137) QC18.3@17.914,235.687 ; RC452.2@18.409,185.259 cw(c17.584,184.434) 18.75,184.434 ; RC452.2@18.5,185.4 18.75,185.15 v1(18.75,183.75) ; 21.25,243.044 ccw(c21.869,243.044) QC34.3@21.431,242.606 ; v1(21.25,245) 21.25,242.317 QC34.3@21.285,242.282 ; RC451.2@22.473,172.295 cw(c21.567,171.185) v1@23,171.185 ; RC451.2@22.6,172.5 23,172.1 v1(23,171.25) ; RC451.2@22.79,172.682 cw(c22.428,172.239) RC451.2@23,172.239 ; CC236.1@26.323,242.727 ccw(c25.896,243.154) 26.5,243.154 ccw(c27.104,243.154) 26.677,242.727 ccw(c27.104,243.154) 27.104,242.55 ccw(c27.104,241.946) CC236.1@26.677,242.373 ; v1@26.5,244 CC236.1@26.5,242.55 QC26.3@31.017,242.55 ; 27.205,242.55 cw(c27.205,241.655) CC339.1@27.838,242.288 ; 27.446,242.55 ccw(c27.446,243.104) CC339.1@27.838,242.712 ; CC203.1@28.167,236.717 cw(c27.484,236.034) 28.45,236.034 cw(c29.416,236.034) CC203.1@28.733,236.717 ; CC203.1@28.167,237.783 ccw(c27.484,238.466) 28.45,238.466 ccw(c29.416,238.466) CC203.1@28.733,237.783 ; RC344.2@28.25,221.4 28.4,221.25 v1(29.75,221.25) ; CC328.1@28.288,234.588 cw(c27.896,234.196) 28.45,234.196 ; CC328.1@28.288,235.412 ccw(c27.896,235.804) 28.45,235.804 ; RC344.2@28.441,221.541 ccw(c29.145,222.245) 29.145,221.25 ; CC201.1@28.45,233.1 CC203.1@28.45,237 ; 28.45,233.955 cw(c29.345,233.955) CC328.1@28.712,234.588 ; 28.45,234.095 ccw(c29.395,234.095) CC201.1@28.727,233.427 ; 28.45,236.045 ccw(c29.345,236.045) 28.712,235.412 ccw(c29.104,235.804) 29.104,235.25 ; CC203.1@28.45,237.25 v1(28.45,238.95) ; CC328.1@28.5,234.75 29,235.25 30.842,235.25 QC6.3@31.06,235.468 ; CC339.1@28.662,242.288 cw(c29.295,241.655) 29.295,242.55 ; CC339.1@28.662,242.712 ccw(c29.054,243.104) 29.054,242.55 ; CC328.1@28.712,234.988 cw(c29.345,234.355) 29.345,235.25 ; 30.463,235.25 ccw(c30.463,235.887) QC6.3@30.914,235.437 ; 30.491,242.55 cw(c30.491,241.988) QC26.3@30.888,242.385 ; v1(73.5,246.75) 74.25,246 74.25,245.003 QC33.3@74.468,244.785 ; 74.25,245.382 ccw(c74.887,245.382) QC33.3@74.437,244.931 ; QC17.3@74.321,232.638 cw(c73.968,232.285) 74.468,232.285 cw(c74.968,232.285) QC17.3@74.615,232.638 ; 74.468,231.584 ccw(c76.034,231.584) 74.927,230.477 ccw(c75.354,230.904) 75.354,230.3 ccw(c75.354,229.696) CC226.1@74.927,230.123 ; QC17.3@74.468,232.785 74.468,230.582 CC226.1@74.75,230.3 76.7,230.3 CC335.1@76.75,230.25 ; 75.705,230.3 cw(c75.705,229.405) CC335.1@76.338,230.038 ; 75.946,230.3 ccw(c75.946,230.854) CC335.1@76.338,230.462 ; QC9.3@82.999,244.931 ccw(c82.394,245.537) 83.25,245.537 ; QC9.3@83.25,245.067 v1(83.25,246) ; v1(89.75,246.5) 89.75,246.25 90.968,245.032 QC15.3@90.968,244.785 ; v1@89.9,246.5 ccw(c90.866,246.5) 90.183,245.817 ; 90.136,245.864 cw(c89.057,244.785) QC15.3@90.583,244.785 ; QC23.3@99.321,244.638 cw(c98.891,244.207) 99.5,244.207 ; v1(99.5,243.5) QC23.3@99.5,244.465 ; v1@105.75,247.35 cw(c105.75,246.384) 106.433,247.067 ; v1(105.75,247.5) 106,247.5 107.468,246.032 QC24.3@107.468,244.785 ; QC24.3@107.321,244.931 ccw(c106.968,245.285) 107.468,245.285 ccw(c107.968,245.285) QC24.3@107.615,244.931 ; v1@115.25,242.736 ccw(c116.741,242.736) QC32.3@115.687,241.681 ; v1(115.25,242.75) 115.25,242.003 QC32.3@115.718,241.535
  Bottom Layer w0.75: v1(57.75,126.5) 57.75,125.5 60,123.25 v1(60,121.4) ; v1(60.05,143.8) 60.925,142.925 ; v1(61.25,139.5) 61.25,141 ; 61.25,141.75 73.5,141.75 77.25,145.5 v1(81.55,145.5) 86,145.5 86.5,145 95,145 96.75,143.25 v1(101.5,143.25) ; 90,230.25 91.5,228.75 93.5,228.75 CC329.1@96,231.25 ; 60.925,142.925 61.25,142.6 61.25,141 ; 60.925,142.925 62,141.85 62,141.75 61.25,141
  Bottom Layer w1: CC335.1@76.75,230.25 CC338.1@82.5,230.25 87.5,230.25 ; CC338.1@82.968,230.532 82.968,231.25 ; QC25.3@82.968,232.785 82.968,231.25 ; 83.75,230.25 82.968,231.032 82.968,231.25 ; 84.765,230.25 ccw(c84.765,233.785) CC340.1@87.265,231.285 ; 86.982,230.628 ccw(c87.81,231.345) 87.81,230.25 ; 87.5,230.646 cw(c88.304,230.646) CC340.1@87.735,231.215 ; CC340.1@87.738,231.283 ccw(c90,233.244) 90,230.25 ; CC340.1@88.164,231.25 ccw(c88.164,232.786) CC244.1@89.25,231.7 ; 89.65,230.6 cw(c90.628,231.579) CC244.1@89.25,231.7 ; 90.331,232.148 cw(c89.25,233.229) CC244.1@89.25,231.7 ; QC31.3@90.968,232.785 89.433,231.25 CC340.1@87.5,231.25 87.5,230.25 ; CC329.1@96,231.25 97.3,231.25 97.75,231.7 99.468,231.7 QC7.3@99.468,232.785 99.468,230.982 CC207.1@100.95,229.5 101.5,230.05 CC209.1@103.5,230.05 107.5,230.05 CC204.1@107.7,230.25 ; CC329.1@96.235,230.965 cw(c96.924,230.276) 96.924,231.25 ; CC205.1@97.267,231.25 ccw(c97.267,231.933) CC205.1@97.75,231.45 cw(c98.354,230.846) 98.354,231.7 ; 100.267,230.183 ccw(c100.95,230.866) CC207.1@100.95,229.9 ; CC207.1@101.056,229.644 cw(c102.036,228.664) 102.036,230.05 ; 104.946,230.05 ccw(c104.946,230.854) CC330.1@105.515,230.285 ; CC330.1@105.985,230.285 ccw(c106.554,230.854) 106.554,230.05 ; CC204.1@107.217,230.05 ccw(c107.217,230.733) CC204.1@107.7,230.25 ; CC204.1@107.7,230.086 ccw(c109.336,230.086) v1@108.179,228.929 ; QC8.3@107.718,232.785 107.7,232.767 CC204.1@107.7,230.25 ; 107.9,229.35 cw(c108.507,229.957) CC204.1@107.7,230.25 ; v1@108.23,228.902 cw(c108.361,229.55) 107.7,229.55 ; v1(108.25,229) 107.7,229.55 ; CC341.1@112.25,229.5 113.55,229.5 CC245.1@114,229.95 ; CC341.1@112.914,229.5 ccw(c112.914,231.036) CC245.1@114,229.95 ; CC245.1@114.2,229.75 v1(116.5,229.75) 115.782,230.468 ; CC245.1@114.483,229.75 cw(c114.483,230.433) CC245.1@114,229.95 ; QC16.3@115.718,231.785 115.718,230.468 115.2,229.95 CC245.1@114,229.95 ; v1@125.65,162.25 ccw(c126.616,162.25) v1@125.933,161.567 ; v1(125.75,162.25) v1@125.75,161.75 ; CC321.1@125.793,160.343 cw(c127.5,158.636) CC320.2@127.5,161.05 ; CC321.1@126.175,160.725 cw(c127.097,159.803) CC320.2@127.458,161.056 ; CC320.2@127.802,161.15 ccw(c127.802,158.248) CC321.1@125.75,160.3 ; CNC10.16@132.77,161.15 CNC10.15@130.23,161.15 ; CNC10.14@132.77,163.69 CNC10.13@130.23,163.69 CNC10.15@130.23,161.15 ; CC338.1@82.665,230.285 ccw(c81.932,231.018) 82.968,231.018 ; CC338.1@82.665,230.285 ccw(c81.932,231.018) 82.968,231.018 ; CC338.1@82.665,230.285 ccw(c81.932,231.018) 82.968,231.018 ; CC338.1@82.665,230.285 ccw(c81.932,231.018) 82.968,231.018 ; CC338.1@82.665,230.285 ccw(c81.932,231.018) 82.968,231.018 ; 87.5,230.25 90,230.25 ; CC244.1@89.25,231.7 89.25,231 90,230.25 ; 107.7,229.55 CC204.1@107.7,230.25 ; CC321.1@125.75,160.3 cw(c127.75,158.528) CC320.2@127.75,161.2 126.3,161.2 v1@125.75,161.75 ; CC321.1@125.75,160.3 v1(125.75,161.5) v1@125.75,161.75 ; CC321.1@125.75,160.3 126.6,161.15 CNC10.15@130.23,161.15 ; v1@125.679,161.429 ccw(c126.233,161.983) 126.233,161.2 cw(c126.233,161.983) v1@125.679,161.429
  other v1: 22.25,219.5 22.25,220.5 22.25,222.5 94.627,229.877 78.25,230.25 79,230.25
  other v6: 55,98.25 56.25,98.25